# Altium PCB VL812 USB3.0 .PcbDoc (part 2 of 2)
Units mil, origin at the board's own origin, x right, y up, seen from the top; angles counter-clockwise.
Board outline 3076.06 x 1594.49 mil, 2 copper layers (TOP, BOTTOM), stack 60.4 mil thick; 108 components, 81 nets, 357 pads, 473 vias.
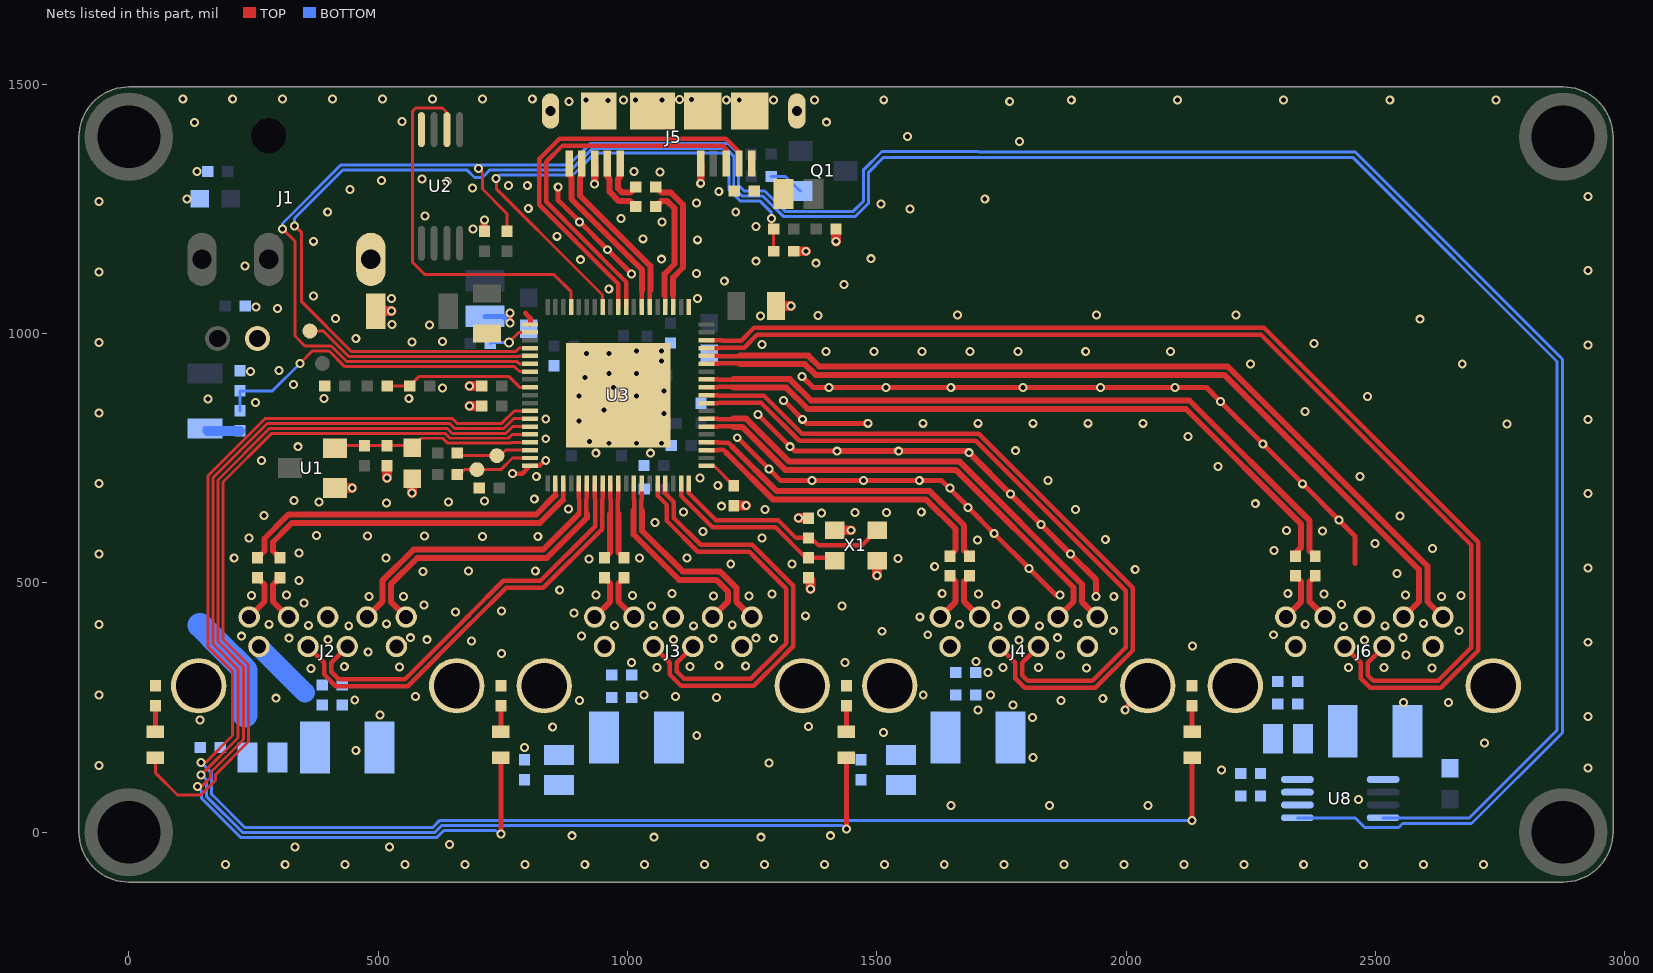
[diagram p2: the nets of this part, all layers, seen from the top]

## Via types
v1: diameter 18/18 (per signal layer), hole 9.84, TOP to BOTTOM, 423 vias
v2: diameter 18/18 (per signal layer), hole 10, TOP to BOTTOM, 42 vias
v3: diameter 20/20 (per signal layer), hole 12, TOP to BOTTOM, 8 vias

## Nets (pads, with @x,y where several pads share a name; then routed paths per layer and width w, separated by ;. In a path a pad name is that pad's centre, name@x,y a point inside that pad or via, vN(x,y) a via of type N, cw(c..) or ccw(c..) an arc to the next point about the centre after c; other vN are vias at no path point) (continued)
DGND: C1.1 C2.1 C3.1 C4.1 C5.1 C6.1 C7.1 C8.1 C9.1 C10.1 C11.1 C12.1 C13.1 C14.1 C15.1 C16.1 C17.1 C18.1 C21.1 C22.1 C23.1 C24.1 C25.1 C26.1 C27.1 C28.1 C29.1 C30.1 C33.1 C34.1 C35.1 C36.1 C39.1 C40.1 C41.1 C42.1 C45.1 C46.1 C47.1 C48.1 C49.1 C50.1 C55.1 C56.1 C57.1 C58.1 C59.1 C60.1 CE1.2 D1.A J1.3 J2.4 J2.7 J2.G1 J2.G2 J3.4 J3.7 J3.G1 J3.G2 J4.4 J4.7 J4.G1 J4.G2 J5.5 J5.8 J5.G1 J5.G2 J5.G3 J5.G4 J5.G5 J5.G6 J6.4 J6.7 J6.G1 J6.G2 R4.2 R7.2 R11.2 R12.2 R13.2 R14.2 R15.2 R17.1 U1.1 U2.4 U3.20 U3.57 U3.G1 U8.1 X1.2 X1.4 | length 4386.7
  TOP w6: v1(1325.95,773) v1@1325.95,774
  TOP w9: v1(768.95,719) 788.53,719 U3.57@804.17,734.65 823.6,734.65 834.95,746 v1(835.95,745)
  TOP w10: v1@505.95,1306 v1(506.95,1307) ; v1(860.95,1294) 860.95,1267 v1(903.95,1224) v1(959.95,1168) 1007.95,1120 v1(1007.95,1119) ; v1(1219.95,791) 1220.95,791 v1(1283.95,728) 1306.95,705 v1(1369.95,705) v1(1472.95,705) v1(1584.95,705) 1629.95,705 1682.95,652 v1(1682.95,651) v1(1735.25,598.7) v1(1805.25,528.7) 1857.95,476 v1(1866.95,476) ; v1@1261.95,837 v1(1325.95,773) 1334.95,764 v1(1419.95,764) ; v1(1312.95,866) v1(1350.92,828.04) 1358.95,820 v1@1480.95,820 ; v1(1349.95,914) 1372.25,891.7 v1(1403.74,891.7) v1(1518.15,891.7) v1(1648.15,891.7) v1(1793.15,891.7) v1(1948.15,891.7) v1(2098.15,891.7) 2160.74,891.7 v1(2188.74,863.7) v1(2273.74,778.7) v1(2353.74,698.7) v1(2426.24,626.2) 2458.74,593.7 2458.74,538.7 ; v1@1477.95,823 v1@1478.45,823.5 ; v1@1477.95,824 v1@1478.45,823.5 ; v1@1478.95,823 v1@1478.45,823.5 ; v1@1478.95,824 v1@1478.45,823.5 ; v1(1738.95,457) v1@1742.95,453 ; v1(1997.95,245) 1997.95,248.5 J4.G2@2043.15,293.7 J4.G2@2043.15,308.2 ; J6.G2@2736.06,293.7 J6.G2@2736.06,308.2
  TOP w12: v1(1419.95,764) v1(1543.74,764) 1681.95,764 v1(1684.95,761) v1(1767.95,678) v1(1828.95,617) v1(1887.95,558) 1938.95,507 v1(1938.95,473)
  TOP w15: C6.1@712.95,1205 v1(712.95,1228) ; v1(934.09,1300) J5.8@934.09,1340.94 ; v1(1146.69,1301.26) J5.5@1146.69,1340.94
  TOP w20: U1.1@412.95,690 v1(447.95,690) ; D1.A@495.12,1045 v1(526.95,1045) ; v1(517.95,710) R4.2@517.95,735 ; v1(567.95,680) C4.1@567.95,709 ; v1(682.95,855) C9.1@707.95,855 ; v1(682.95,895) C17.1@707.95,895 ; R11.2@1212.95,655 v1(1237.95,655) ; C27.1@1297.95,1055 v1(1327.95,1055) ; R7.2@1332.95,1165 v1(1357.95,1165) ; v1(1342.95,630) C30.1@1362.95,630 ; C29.1@1362.95,510 1366.95,506 v1(1366.95,488) ; X1.4@1415.63,605.51 v1(1447.95,605.51) ; v1(1417.95,1185) C56.1@1417.95,1210 ; v1(1500.28,515) X1.2@1500.28,544.49
  BOTTOM w10: v1(902.95,875) 924.95,875 v1(952.95,847) ; v1(917.95,960) 914.95,957 v1(914.95,912) 922.95,920 v1(962.95,920) ; v1(962.95,960) v1(962.95,920) ; v1(971.95,892) 971.95,911 v1(962.95,920) ; v1(1017.95,875) 1027.95,885 v1(1072.95,885) ; C26.1@1038.95,916 1034.95,920 v1(1017.95,920) v1(962.95,920)
  other v1: 193.4,-65 313.53,-65 433.67,-65 553.81,-65 673.95,-65 794.09,-65 914.23,-65 1034.36,-65 1154.5,-65 1274.64,-65 1394.78,-65 1514.92,-65 1635.05,-65 1755.19,-65 1875.33,-65 1995.47,-65 2115.61,-65 2235.74,-65 2355.88,-65 2476.02,-65 2596.16,-65 2716.3,-65 332.95,-30 522.95,-30 642.95,-25 1052.95,-10 1267.95,-10 888.95,-7 1406.95,-7 1648.74,53.7 1846.24,53.7 2043.74,53.7 2465.64,66 2191.3,125 2926.3,128.6 -59.85,133.6 1283.74,138.7 1812.95,150 455,163.7 792.95,170 2718.74,178.7 1138.74,193.7 1512.95,200 849.95,211 1362.95,212 142.95,225 1811.95,230 2926.3,231.91 503.95,235 1702.95,245 1772.95,255 2556.3,260 2646.3,260 903.95,264 1868.95,264 452.95,265 295,268.7 1952.95,268 1177.95,270 574.95,272 1095.95,272 -59.85,274.95 1032.95,275 1592.95,275 1727.95,275 1722.95,320 364.95,328 1919.95,329 2612.87,329 1058.95,330 1752.95,330 1823.95,330 2445.87,330 2516.87,330 542.95,331 431.95,332 1124.95,332 1236.95,333 1182.95,334 1007.95,340 1435.95,340 1698.95,342 1867.95,355 2560.87,355 747.32,358.7 479.95,361 2133.15,373.7 2926.3,380.92 687.32,383.7 1784.95,385 2477.87,385 398.95,386 597.95,386 1091.95,386 1170.95,388 1292.95,388 320.95,389 1257.95,389 564.95,390 1861.95,390 2554.87,390 225.95,393 907.32,393.7 1601.95,396 2294.87,396 1509.95,403 1973.95,404 2666.87,404 1742.95,413 2435.87,413 440.95,414 1131.95,414 1825.95,414 2518.87,414 359.95,415 973.95,415 1051.95,415 -59.85,416.3 1209.95,416 280.95,417 1665.95,417 2358.87,417 516.95,418 1902.95,419 2595.87,419 1585.95,432 1356.95,434 892.95,440 654.95,442 747.32,443.7 1047.95,454 1429.95,454 591.95,456 2431.87,457 350.95,460 481.95,473 550.95,473 1243.74,473.7 1974.95,473 2631.87,473 1171.95,474 245.95,475 1009.95,475 2671.3,475 315.95,476 936.95,476 2559.87,476 1088.74,478.7 1289.95,478 1703.95,478 2396.87,478 1630.95,479 2323.87,479 863.95,486 341.3,505 2543.15,518.7 589.95,523 680.95,524 814.95,524 2017.95,527 2926.3,529.94 1615.95,533 1206.95,538 1329.95,538 922.95,548 1541.95,549 211.3,550 515.95,550 1023.95,550 1118.95,550 -59.85,557.65 341.3,560 2296.3,565 2613.74,568.7 2498.74,578.7 1701.95,586 1957.95,587 241.3,590 1269.95,590 478.74,593.7 708.95,593 819.95,593 592.95,594 376.3,595 1151.16,603.21 2393.74,603.7 2321.3,605 1054.95,621 2548.74,633.7 271.3,635 1388.95,640 1455.95,641 1518.95,641 1111.95,642 1588.95,642 1275.95,647 1897.95,647 881.95,648 1188.74,653.7 2258.74,658.7 516.3,660 380.95,662 640.95,662 712.95,664 331.3,665 812.95,668 2926.3,678.95 1646.3,690 1180.95,695 -59.85,699 1842.95,705 1144.95,710 816.95,713 2468.74,713.7 2183.74,733.7 266.3,745 936.3,760 1045.95,760 1777.95,765 338.95,773 962.95,780 1017.95,780 1067.95,780 923.74,783.7 835.95,789 2123.74,793.7 2763.74,818.7 1481.95,820 1592.31,820 1702.67,820 1813.02,820 1923.38,820 2033.74,820 902.95,825 2926.3,827.96 835.95,829 1261.95,838 -59.85,840.35 1072.95,840 2358.74,843.7 253.95,862 158.74,868.7 391.3,870 561.3,870 2483.74,873.7 628.95,891 329.95,898 243.95,924 300.95,926 2248.74,938.7 2673.74,938.7 1067.95,945 1918.74,963.7 2088.74,963.7 1397.95,964 1494.25,964 1590.55,964 1686.85,964 1783.15,964 1017.95,965 1067.95,965 2926.3,976.97 1269.95,978 2376.3,980 -59.85,981.7 567.95,983 628.74,983.7 455,990 602.95,1017 527.95,1018 2588.74,1028.7 414.09,1030 1266.95,1035 1381.95,1036 1661.3,1037 1940.65,1037 2220,1037 297.95,1050 254.95,1053 526.95,1070 1139.95,1070 370,1075 962.35,1089 1433.74,1098.7 1193.95,1105 1137.95,1120 -59.85,1123.05 2926.3,1125.99 232.95,1135 1377.95,1141 1257.95,1145 905.31,1148 1067.95,1149 1487.95,1150 370,1185 1139.95,1188 1031.3,1190 858.15,1195 689.95,1210 1257.95,1215 1068.95,1224 986.95,1231 593.95,1236 398.74,1243.7 1216.95,1244 1566.3,1250 800.95,1251 1507.95,1260 1137.95,1262 -59.85,1264.4 116.3,1270 1716.3,1270 2926.3,1275 1182.95,1285 443.74,1288.7 688.95,1292 760.95,1297 798.95,1297 637.95,1305 587.95,1310 1064.95,1324 136.3,1325 1012.95,1325 1786.3,1385 1561.3,1395 131.95,1423 1398.74,1423.7 547.95,1425 882.95,1465 1766.3,1465 960.95,1467 916.95,1468 991.95,1468 1015.95,1468 1068.95,1468 1197.95,1468 1223.95,1468 1292.95,1468 1374.95,1468 1513.74,1468.7 1889.73,1468 2102.62,1468 2315.52,1468 2528.41,1468 2741.3,1468 1103.95,1469 1127.95,1469 108.15,1470 208.26,1470 308.38,1470 408.49,1470 508.61,1470 608.72,1470 708.84,1470 808.95,1470
EXTPWRON: R6.2 R8.2 U3.47 | length 302.7
  TOP w6: R6.2@517.95,895 R8.2@562.95,895 581.45,913.5 762.56,913.5 783.93,892.13 U3.47@804.17,892.13
GRN1: U3.53 U4.1 | length 1491.2
  TOP w6: U4.1@53.15,149.41 53.15,119.29 97.71,74.73 144.03,74.73 173.74,104.45 173.74,115.5 239.95,181.71 239.95,335.14 188.74,386.36 188.74,702.36 286.38,800 633.81,800 643.81,790 760.95,790 768.59,797.64 U3.53@804.17,797.64
GRN2: U3.52 U5.1 | length 2176.8
  TOP w6: v2(137.19,91.23) 145.19,91.23 163.74,109.79 163.74,119.64 229.95,185.86 229.95,331 178.74,382.21 178.74,706.5 282.24,810 637.95,810 647.95,800 756.24,800 769.62,813.39 U3.52@804.17,813.39
  TOP w10: v2(746.06,-4) U5.1@746.06,149.41
  BOTTOM w6: v2(137.19,91.23) 145.45,82.97 145.45,68.25 166.26,47.44 224.7,-11 616.95,-11 631.45,3.5 735.45,3.5 v2@742.95,-4
GRN3: U3.51 U6.1 | length 2852.4
  TOP w6: v2(144.95,115) 218.95,189 218.95,327 168.74,377.21 168.74,710.64 278.1,820 642.95,820 652.95,810 752.1,810 771.23,829.13 U3.51@804.17,829.13
  TOP w10: v2(1438.97,6) U6.1@1438.97,149.41
  BOTTOM w6: v2(144.95,115) 155.45,105 155.45,72.4 228.85,-1 612.81,-1 627.31,13.5 1430.45,13.5 v2@1437.95,6
GRN4: U3.50 U7.1 | length 3532.1
  TOP w6: v2(144.95,140) 153.95,140 207.95,194 207.95,322.86 158.74,372.07 158.74,714.79 273.95,830 647.95,830 657.95,820 747.95,820 772.83,844.88 U3.50@804.17,844.88
  TOP w10: v2(2131.89,23.7) U7.1@2131.89,149.41
  BOTTOM w6: v2(144.95,140) 165.45,119.5 165.45,76.54 174.54,67.45 232.99,9 608.67,9 623.67,24 1881.95,24 ; 1882.25,23.7 v2(2131.89,23.7)
N17202796: L1.1 U3.39 | length 118.8
  TOP w10: v2(763.95,1021) v2(763.95,1040.85) ; 794.95,1040.85 804.95,1030.85 804.95,1018.89 U3.39@804.17,1018.11
  BOTTOM w10: L1.1@713.95,1034.57 L1.1@750.39,1034.57 ; v2(763.95,1021) L1.1@750.39,1034.57 ; v2(763.95,1040.85) 757.67,1034.57 L1.1@750.39,1034.57
N19199549: R12.1 U4.2 | length 51.9
  TOP w10: U4.2@53.15,201.77 R12.1@53.15,253.7
N19199561: R13.1 U5.2 | length 51.9
  TOP w10: U5.2@746.06,201.77 R13.1@746.06,253.7
N19199573: R14.1 U6.2 | length 51.9
  TOP w10: U6.2@1438.97,201.77 R14.1@1438.97,253.7
N19199609: R15.1 U7.2 | length 51.9
  TOP w10: U7.2@2131.89,201.77 R15.1@2131.89,253.7
N19280601: Q1.G R3.1 | length 71
  BOTTOM w6: R3.1@1287.95,1315 1316.95,1315 1345.95,1286 Q1.G@1346.95,1286
N19324774: C55.2 FB4.1 J5.1 | length 7.1
  TOP w15: FB4.1@1307.95,1285 FB4.1@1312.95,1280
N19347185: R19.1 U3.40 | length 88.5
  TOP w6: v3(761.95,982) 782.31,1002.36 U3.40@804.17,1002.36
  BOTTOM w6: R19.1@724.95,980 726.95,982 v3(761.95,982)
OVCUR1: R16.2 R17.2 U3.45 | length 671.5
  TOP w6: v2(342.95,940) 367.95,965 401.67,965 433.17,933.5 773.45,933.5 783.33,923.62 U3.45@804.17,923.62
  BOTTOM w6: R16.2@222.95,845 R17.2@222.95,885 287.95,885 v2(342.95,940)
OVCUR2B: R18.2 U3.44 U8.5 | length 5255.9
  TOP w6: v2(307.95,1210) 332.95,1185 332.95,995 352.95,975 405.81,975 437.31,943.5 778.82,943.5 782.95,939.37 U3.44@804.17,939.37 ; v2(701.45,1330.76) 708.95,1323.26 708.95,1289.85 757.95,1240.86 757.95,1240 R18.2@757.95,1205
  BOTTOM w6: v2(307.95,1210) 307.95,1220.86 425.35,1338.26 v2@698.19,1338.26 ; U8.5@2343.15,29.02 2458.56,29.02 2478.17,9.4 2546.17,9.4 2554.17,17.4 2692.44,17.4 2874.74,199.7 2874.74,948.26 2458.61,1364.39 1703.57,1364.39 1702.95,1365 1510.04,1365 1473.45,1328.41 1473.45,1265.65 1452.8,1245 1316.1,1245 1275.1,1286 1233.95,1286 1222.95,1297 1222.95,1360 1201.45,1381.5 926.03,1381.5 882.79,1338.25 874.51,1338.25 v2@704.71,1338.26 ; v2@698.19,1338.26 v2@701.45,1335 ; v2@698.19,1338.26 v2(701.45,1330.76) ; v2(701.45,1330.76) v2@704.71,1338.26 ; v2(701.45,1330.76) v2@701.45,1335 ; v2@701.45,1335 v2@704.71,1338.26
P5V_DP1: C36.2 C42.2 C50.2 F1.1 FB1.2 FB2.2 FB3.2 R16.1 R20.1 R20.2 | length 301.2
  BOTTOM w10: F1.1@152.95,810 F1.1@157.95,805
  BOTTOM w20: F1.1@157.95,805 R16.1@222.95,805
  BOTTOM w35: R20.1@225.87,330.08 R20.1@233.31,324.64
  BOTTOM w47.17: R20.2@182.03,373.92 R20.2@183.03,374.92 ; R20.1@225.87,330.08 R20.1@226.87,331.08
  BOTTOM w50: 142.95,415 183.03,374.92 226.87,331.08 233.31,324.64 233.31,235.36
P5V_DP1_E: C33.2 C34.2 C35.2 FB1.1 J2.1 | length 130.6
  BOTTOM w40: J2.1@260.87,372.44 260.87,372.09 352.95,280
P5V_DP2_E: C39.2 C40.2 C41.2 FB2.1 J3.1
P5V_DP3_E: C47.2 C48.2 C49.2 FB3.1 J4.1
P5V_DP4: C46.2 C60.2 FB5.2 U8.6 U8.7 U8.8
P5V_DP4_E: C57.2 C58.2 C59.2 FB5.1 J6.1
PWREN1: DESIGNATOR1/2.1 U3.43 | length 463.2
  TOP w6: DESIGNATOR1/2.1@362.95,1005 389.95,1005 441.45,953.5 781.24,953.5 782.86,955.12 U3.43@804.17,955.12
PWREN2B: U3.42 U8.4 | length 4786.8
  TOP w6: v2(332.21,1216.06) 346.45,1201.82 346.45,1063.5 446.45,963.5 775.45,963.5 782.82,970.87 U3.42@804.17,970.87
  BOTTOM w6: v2(332.21,1216.06) 332.21,1230.97 429.5,1328.26 677.69,1328.26 692.95,1313 708.95,1313 724.21,1328.25 729.2,1328.26 743.71,1328.25 878.65,1328.25 886.93,1328.25 930.18,1371.5 1197.1,1371.5 1212.95,1355.64 1212.95,1292.86 1229.81,1276 1270.95,1276 1311.95,1235 1456.94,1235 1483.45,1261.51 1483.45,1323.41 1513.42,1353.39 2454.05,1353.39 2863.74,943.7 2863.74,204.26 2688.5,29.02 U8.4@2515.19,29.02
RST_OUT: C4.2 R2.2 R4.1 U1.2 U3.54 | length 414.1
  TOP w6: U1.2@412.95,770 417.95,775 R2.2@472.95,775 R4.1@517.95,775 C4.2@562.95,775 ; U3.54@804.17,781.89 766.99,781.89 765.1,780 639.67,780 629.67,790 586.95,790 C4.2@567.95,771 ; C4.2@562.95,775 566.95,771 C4.2@567.95,771 ; C4.2@562.95,775 C4.2@567.95,771
SMCLK/TX: DESIGNATOR1/3.1 R10.2 U3.55 | length 151.9
  TOP w6: R10.2@658.95,760 663.95,755 DESIGNATOR1/3.1@737.95,755 743.95,755 755.09,766.14 U3.55@804.17,766.14
SMDAT/RX: DESIGNATOR1.1 R9.2 U3.56 | length 159.1
  TOP w6: R9.2@658.95,717 662.6,717 672.6,727 DESIGNATOR1.1@697.95,727 745.95,727 769.35,750.39 U3.56@804.17,750.39
SPISO: U2.2 U3.35 | length 785.2
  TOP w6: U2.2@637.78,1409 637.78,1443.17 628.95,1452 574.95,1452 568.4,1445.44 568.4,1143.41 593.81,1118 852.38,1118 886.85,1083.53 U3.35@886.85,1053.54
SSREXT: R11.1 U3.1 | length 70.9
  TOP w6: U3.1@1158.5,734.65 1173.31,734.65 R11.1@1212.95,695
SSRX0+: J5.10 U3.26 | length 347.7
  TOP w9: U3.26@1028.58,1053.54 1028.58,1086
  TOP w12: J5.10@882.91,1340.94 882.91,1317.68 887.21,1313.38 887.21,1269.75 1028.59,1128.37 1028.58,1086
SSRX0-: J5.9 U3.25 | length 348.3
  TOP w9: U3.25@1044.33,1053.54 1044.33,1086.37 1045.59,1087.63
  TOP w12: J5.9@908.5,1340.94 908.5,1317.32 904.21,1313.02 904.21,1276.79 1045.59,1135.41 1045.59,1087.63
SSRX1+: J2.6 U3.62 | length 602.8
  TOP w9: 901.97,640.35 903.47,641.85 ; U3.62@902.6,699.21 902.6,668.22 903.47,667.35 903.47,641.85 ; 903.47,641.85 901.97,638.02 901.97,638.1 903.47,641.85
  TOP w12: J2.6@477.4,431.5 508.27,462.37 508.27,504.36 570.91,567 830.95,567 901.97,638.02
SSRX1-: J2.5 U3.63 | length 600.9
  TOP w9: U3.63@918.35,699.21 918.35,668.22 917.47,667.35 917.47,641.85 ; 917.47,641.85 918.97,640.35 918.97,638.1 917.47,641.85
  TOP w12: J2.5@556.14,431.5 525.27,462.37 525.27,497.32 577.95,550 837.99,550 918.97,630.98 918.97,638.1
SSRX2+: J3.6 U3.69 | length 422.5
  TOP w9: 1012.21,640.35 1013.71,641.85 ; U3.69@1012.83,699.21 1012.83,668.22 1013.71,667.35 1013.71,649.22 ; 1012.21,645.47 1012.21,647.72 1013.71,649.22 ; 1012.21,645.47 1013.71,649.22 ; 1012.21,645.47 1013.71,645.47 ; 1012.21,645.47 1013.71,641.85 ; 1013.71,641.85 1013.71,645.47 ; 1013.71,645.47 1013.71,649.22
  TOP w12: 1012.21,645.47 1012.21,640.35 1012.21,597.05 1103.26,506 1178.06,506 1201.19,482.88 1201.19,462.37 1185.57,446.75 J3.6@1170.31,431.5
SSRX2-: J3.5 U3.70 | length 422.5
  TOP w9: U3.70@1028.58,699.21 1028.58,668.22 1027.71,667.35 1027.71,649.22 ; 1029.21,640.35 1027.71,641.85 ; 1027.71,641.85 1027.71,645.47 ; 1027.71,641.85 1029.21,645.47 ; 1027.71,645.47 1027.71,649.22 ; 1027.71,645.47 1029.21,645.47 ; 1027.71,649.22 1029.21,645.47 ; 1027.71,649.22 1029.21,647.72 1029.21,645.47
  TOP w12: 1029.21,645.47 1029.21,640.35 1029.21,604.09 1110.3,523 1185.11,523 1218.19,489.92 1218.19,462.35 1225.05,455.5 J3.5@1249.05,431.5
SSRX3+: J4.6 U3.6 | length 946
  TOP w9: U3.6@1158.5,813.39 1182.12,813.39 1182.99,814.26 1208.49,814.26 ; 1208.49,814.26 1212.24,812.76 1209.99,812.76 1208.49,814.26
  TOP w12: 1212.24,812.76 1230.15,812.76 1316.91,726 1658.85,726 1894.1,490.75 1894.1,462.37 J4.6@1863.23,431.5
SSRX3-: J4.5 U3.7 | length 974.2
  TOP w9: U3.7@1158.5,829.13 1182.12,829.13 1182.99,828.26 1208.49,828.26 ; 1208.49,828.26 1212.24,829.76 1209.99,829.76 1208.49,828.26
  TOP w12: 1212.24,829.76 1237.19,829.76 1323.95,743 1665.89,743 1911.1,497.79 1911.1,462.37 J4.5@1941.97,431.5
SSRX4+: J6.6 U3.14 | length 1712
  TOP w9: U3.14@1158.5,939.37 1182.12,939.37 1182.99,940.24 1221.68,940.24 ; 1221.68,940.24 1223.18,938.74 1225.43,938.74 1221.68,940.24
  TOP w12: 1225.43,938.74 1355.56,938.74 1377.3,917 2196.4,917 2587.01,526.39 2587.01,462.37 J6.6@2556.14,431.5
SSRX4-: J6.5 U3.15 | length 1740.2
  TOP w9: U3.15@1158.5,955.12 1182.12,955.12 1182.99,954.24 1221.68,954.24 ; 1221.68,954.24 1223.18,955.74 1225.43,955.74 1221.68,954.24
  TOP w12: 1225.43,955.74 1362.6,955.74 1384.34,934 2203.44,934 2604.01,533.43 2604.01,462.37 J6.5@2634.88,431.5
SSTX0+: C51.1 U3.23 | length 257.9
  TOP w9: U3.23@1075.83,1053.54 1075.83,1074.78 ; 1075.83,1074.78 1074.33,1076.28 1074.33,1077.4 1075.83,1074.78
  TOP w12: C51.1@1056.45,1254.33 1067.64,1265.51 1079.97,1265.51 1094.26,1251.22 1094.26,1139.35 1074.33,1119.42 1074.33,1077.4
SSTX0+_E: C51.2 J5.7 | length 123.5
  TOP w12: J5.7@959.68,1340.94 959.68,1314.3 963.98,1310 963.98,1283.97 982.44,1265.51 1005.27,1265.51 C51.2@1016.45,1254.33
SSTX0-: C52.1 U3.22 | length 282.4
  TOP w9: U3.22@1091.57,1053.54 1091.57,1077.16
  TOP w12: C52.1@1056.45,1293.7 1067.95,1282.51 1087.01,1282.51 1111.26,1258.26 1111.26,1132.31 1091.33,1112.37 1091.57,1077.16
SSTX0-_E: C52.2 J5.6 | length 95.3
  TOP w12: J5.6@985.27,1340.94 985.27,1314.29 980.98,1310 980.98,1291.02 989.48,1282.51 1005.27,1282.51 C52.2@1016.45,1293.7
SSTX1+: C31.1 U3.59 | length 687.8
  TOP w9: 855.35,675.44 U3.59@855.35,699.21
  TOP w12: C31.1@257.95,550 271.95,564 271.95,589 313.95,631 319.95,637 816.91,637 855.35,675.44
SSTX1+_E: C31.2 J2.9 | length 97
  TOP w12: J2.9@241.18,431.5 271.95,462.27 271.95,496 C31.2@257.95,510
SSTX1-: C32.1 U3.60 | length 689.4
  TOP w9: 870.23,666.28 871.1,668.22 ; 870.23,667.35 871.1,668.22 ; U3.60@871.1,699.21 871.1,668.22
  TOP w9.85: 870.23,666.28 870.23,667.35
  TOP w12: C32.1@302.95,550 288.95,564 288.95,581.96 320.99,614 326.99,620 823.95,620 870.23,666.28
SSTX1-_E: C32.2 J2.8 | length 97.1
  TOP w12: C32.2@302.95,510 288.95,496 288.95,462.47 J2.8@319.92,431.5
SSTX2+: C37.1 U3.66 | length 158.9
  TOP w9: U3.66@965.59,699.21 965.59,668.22 966.46,667.35 966.46,641.85 ; 966.46,641.85 964.96,640.35 964.96,638.1 966.46,641.85
  TOP w12: C37.1@953.78,549.92 964.96,561.11 964.96,638.1
SSTX2+_E: C37.2 J3.9 | length 95.8
  TOP w12: J3.9@934.09,431.5 964.96,462.36 964.96,498.74 C37.2@953.78,509.92
SSTX2-: C38.1 U3.67 | length 158.9
  TOP w9: U3.67@981.34,699.21 981.34,668.22 980.46,667.35 980.46,641.85 ; 980.46,641.85 981.96,638.1 981.96,640.35 980.46,641.85
  TOP w12: 981.96,638.1 981.96,561.1 C38.1@993.15,549.92
SSTX2-_E: C38.2 J3.8 | length 95.8
  TOP w12: C38.2@993.15,509.92 981.96,498.74 981.96,462.37 J3.8@1012.83,431.5
SSTX3+: C43.1 U3.3 | length 624.4
  TOP w9: U3.3@1158.5,766.14 1182.12,766.14 1182.99,767.02 1191.94,767.02 1198.45,760.5
  TOP w12: 1198.45,760.5 1291.95,667 1598.91,667 1657.87,608.04 1657.87,565.92 1646.69,554.74 C43.1@1646.69,553.86
SSTX3+_E: C43.2 J4.9 | length 99.8
  TOP w12: J4.9@1627.01,431.5 1657.87,462.36 1657.87,502.67 C43.2@1646.69,513.86
SSTX3-: C44.1 U3.4 | length 651.3
  TOP w9: U3.4@1158.5,781.89 1182.12,781.89 1182.99,781.02 1201.98,781.02 1210.47,772.52
  TOP w12: 1210.47,772.52 1298.99,684 1605.95,684 1674.87,615.08 1674.87,565.08 C44.1@1686.06,553.86
SSTX3-_E: C44.2 J4.8 | length 99.8
  TOP w12: C44.2@1686.06,513.86 1674.87,502.67 1674.87,462.37 J4.8@1705.75,431.5
SSTX4+: C53.1 U3.11 | length 1380
  TOP w9: U3.11@1158.5,892.13 1182.12,892.13 1182.99,893 1208.49,893 ; 1208.49,893 1209.99,891.5 1212.24,891.5 1208.49,893
  TOP w12: 1212.24,891.5 1318.41,891.5 1361.21,848.7 2119.7,848.7 2350.79,617.61 2350.79,571.25 2339.6,560.07 C53.1@2339.6,553.86 C53.1@2339.6,552.98
SSTX4+_E: C53.2 J6.9 | length 99.8
  TOP w12: J6.9@2319.92,431.5 2350.79,462.36 2350.79,502.67 C53.2@2339.6,513.86
SSTX4-: C54.1 U3.12 | length 1407.6
  TOP w9: U3.12@1158.5,907.87 1182.12,907.87 1182.99,907 1208.49,907 ; 1208.49,907 1209.99,908.5 1212.24,908.5 1208.49,907
  TOP w12: 1212.24,908.5 1325.45,908.5 1368.25,865.7 2126.74,865.7 2367.79,624.65 2367.79,564.2 C54.1@2378.53,553.42
SSTX4-_E: C54.2 J6.8 | length 99.8
  TOP w12: C54.2@2378.97,513.86 2367.79,502.67 2367.79,462.37 J6.8@2398.66,431.5
SSXI: C29.2 U3.75 X1.1 | length 386.8
  TOP w9: U3.75@1107.32,699.21 1107.32,674.63 1169.95,612 1295.95,612 1357.95,550 C29.2@1362.95,550 1410.12,550 X1.1@1415.63,544.49
SSXO: C30.2 U3.76 X1.3 | length 452.6
  TOP w9: U3.76@1123.07,699.21 1123.07,679.88 1176.95,626 1301.75,626 1303.75,624 1337.95,590 C30.2@1362.95,590 1367.95,590 1382.95,575 1469.76,575 X1.3@1500.28,605.51
USBDP+: J5.3 U3.28 | length 763.2
  TOP w9: U3.28@997.09,1053.54 997.09,1103.31 984.95,1115.45 836.95,1264 836.95,1344.2 869.69,1376.94 1190.93,1376.94 1197.87,1370 J5.3@1197.87,1340.94
USBDP-: J5.2 U3.29 | length 813.9
  TOP w9: U3.29@981.34,1053.54 981.34,1099.26 970.95,1109.65 822.95,1258.2 822.95,1350 863.89,1390.94 1197.01,1390.94 1223.46,1364.49 J5.2@1223.46,1340.94
USBHP1+: J2.3 U3.64 | length 812.3
  TOP w9: J2.3@438.03,372.44 405.66,340.07 405.66,322.09 420.75,307 553.58,307 676.33,429.75 682.12,435.43 750.67,504 825.38,504 934.97,613.59 934.97,667.35 934.09,668.22 U3.64@934.09,699.21
USBHP1-: J2.2 U3.65 | length 858.7
  TOP w9: J2.2@359.29,372.44 391.66,340.07 391.66,316.29 414.95,293 559.38,293 682.24,415.75 692.02,425.53 756.47,490 831.18,490 940.57,599.39 948.97,607.79 948.97,667.35 949.84,668.22 U3.65@949.84,699.21
USBHP2+: J3.3 U3.72 | length 806.4
  TOP w9: U3.72@1060.08,699.21 1060.95,698.34 1060.95,674.2 1078.95,656.2 1078.95,624.2 1140.8,562.35 1244.07,562.35 1295.95,510.46 1302.95,503.46 1317.95,488.46 1317.95,378.46 1307.44,367.95 1300.65,361.16 1247.19,307.7 1113.12,307.7 1098.57,322.24 1098.57,340.07 J3.3@1130.94,372.44
USBHP2-: J3.2 U3.73 | length 852.8
  TOP w9: J3.2@1052.2,372.44 1084.57,340.07 1084.57,316.45 1107.32,293.7 1252.99,293.7 1310.55,351.26 1317.34,358.05 1331.95,372.66 1331.95,494.26 1316.95,509.26 1309.95,516.26 1249.87,576.35 1146.6,576.35 1092.95,630 1092.95,662 1074.95,680 1074.95,698.34 U3.73@1075.83,699.21
USBHP3+: J4.3 U3.9 | length 1421.7
  TOP w9: U3.9@1158.5,860.63 1182.12,860.63 1182.99,861.5 1267.65,861.5 1344.15,785 1698.15,785 1998.83,484.32 1998.83,370.36 1932.23,303.76 1802.09,303.76 1791.49,314.37 1791.49,340.07 J4.3@1823.86,372.44
USBHP3-: J4.2 U3.10 | length 1491.3
  TOP w9: U3.10@1158.5,876.38 1182.12,876.38 1182.99,875.5 1273.45,875.5 1349.95,799 1703.95,799 2012.83,490.12 2012.83,364.57 1938.03,289.76 1796.3,289.76 1777.49,308.57 1777.49,340.07 J4.2@1745.12,372.44
USBHP4+: J6.3 U3.16 | length 2235.7
  TOP w9: U3.16@1158.5,970.87 1182.12,970.87 1182.99,971.74 1233.83,971.74 1260.09,998 2269.64,998 2691.74,575.9 2691.74,370.36 2625.14,303.76 2495.01,303.76 2484.4,314.37 2484.4,340.07 J6.3@2516.77,372.44
USBHP4-: J6.2 U3.17 | length 2305.2
  TOP w9: U3.17@1158.5,986.61 1189,986.61 1189.87,985.74 1228.03,985.74 1254.3,1012 2275.44,1012 2705.74,581.7 2705.74,364.57 2630.94,289.76 2489.21,289.76 2470.4,308.57 2470.4,340.07 J6.2@2438.03,372.44
VBUSDET: R5.2 R7.1 U3.31 | length 1084.9
  TOP w6: U3.31@949.84,1053.54 949.84,1077.11 871.52,1155.57 834.59,1192.5 807.81,1219.28 736.95,1290.14 v2@736.95,1310 ; v2(1288.95,1231) 1288.95,1214 R5.2@1292.95,1210 R7.1@1292.95,1165 ; v2@736.95,1310 736.45,1310.5 v2(736.45,1310.76) v2@736.95,1310
  BOTTOM w6: v2(736.45,1310.76) 743.69,1318 890.82,1318 934.32,1361.5 1192.95,1361.5 1202.95,1351.5 1202.95,1288.71 1225.67,1266 1264.95,1266 1288.95,1242 v2(1288.95,1231)
pads on no net: J1._ J5.4 U3.21
copper on no net: | length 2960
  BOTTOM w6: 675.95,1021.5 772.95,1021.5 772.95,1018.5 675.95,1018.5 675.95,1024.5 772.95,1024.5 772.95,1030.5 ; 675.95,1027.5 675.95,1033.5 ; 675.95,1030.5 675.95,1036.5 ; 681.09,1058 681.09,1010 687.09,1010 687.09,1058 693.09,1058 693.09,1010 699.09,1010 699.09,1058 705.09,1058 705.09,1010 711.09,1010 711.09,1058 717.09,1058 717.09,1010 723.09,1010 723.09,1058 729.09,1058 729.09,1010 735.09,1010 735.09,1058 741.09,1058 741.09,1010 738.09,1010 738.09,1058 732.09,1058 732.09,1010 726.09,1010 726.09,1058 720.09,1058 720.09,1010 714.09,1010 714.09,1058 708.09,1058 708.09,1010 702.09,1010 702.09,1058 696.09,1058 696.09,1010 690.09,1010 690.09,1058 684.09,1058 684.09,1010 678.09,1010 678.09,1058 675.95,1054.5 762.24,1054.5 762.09,1010 ; 744.09,1010 744.09,1058 ; 753.09,1010 756.09,1010 ; 753.09,1058 747.09,1058 747.09,1010 750.09,1010 750.09,1058 756.09,1058 ; 759.09,1010 765.09,1010 765.24,1051.5 675.95,1051.5 675.95,1057.5 759.09,1057.64 ; 772.95,1033.5 772.95,1039.5 675.95,1039.5 675.95,1045.5 771.09,1045.64 771.45,1015.5 675.95,1015.5 675.95,1012.5 768.09,1012.14 768.24,1048.5 675.95,1048.5 675.95,1042.5 772.95,1042.5 772.95,1036.5 ; 675.95,1010 675.95,1058 758.74,1058 772.95,1043.78 772.95,1017 765.95,1010 675.95,1010

## Polygon pours and split planes (outlines as drawn)
P5V_DP4 on BOTTOM "BOTTOM-P5V_DP4" (solid, remove dead copper, pour order 32): 2333.17,128.4 2372.17,128.4 2379.17,121.4 2379.17,50.4 2375.17,46.4 2260.17,46.4 2254.17,52.4 2254.17,202.4 2269.17,217.4 2314.17,217.4 2314.17,147.4
1_2V on BOTTOM "BOTTOM-1_2V" (solid, remove dead copper, pour order 29): 896.95,1059.97 896.95,1015 891.95,1010 842.95,1010 839.95,1013 839.95,1029 815.95,1053 784.95,1053 762.95,1075 677.95,1075 673.95,1079 673.95,1127 830.95,1127
P5V_DP1_E on BOTTOM "BOTTOM-P5V_DP1_E" (solid, remove dead copper, pour order 28): 286.95,186 336.95,236 336.95,311 402.95,311 402.95,121 286.95,121
P5V_DP2_E on BOTTOM "BOTTOM-P5V_DP2_E" (solid, remove dead copper, pour order 27): 852.95,175 932.95,255 933.09,382.5 943.09,392.5 965.46,392.5 982.95,375 982.95,132 832.95,132 832.95,175
P5V_DP1 on BOTTOM "BOTTOM-P5V_DP1" (solid, remove dead copper, pour order 26): 175.95,80.89 175.95,113.49 171.96,117.49 171.96,122.34 170.96,128.01 170.95,323 113.02,379.43 113.02,817.43 114.02,830.43 192.95,829.99 192.95,400 234.15,358.72 239.32,352.16 243.11,348.78 245.99,346.96 282.95,310 282.95,206 268.95,192 268.95,113 279.95,102 537.95,102 552.95,117 1577.95,117 1577.92,34.5 619.32,34.5 604.32,19.5 237.34,19.5
ADAPTERIN on BOTTOM "BOTTOM-ADAPTERIN 1" (solid, remove dead copper, pour order 25): 182.95,1255 182.95,1335 261.95,1415 427.95,1415 437.95,1405 437.95,1380 263,1205.17 260.18,1203.52 257.51,1201.62 255.02,1199.5 252.72,1197.17 250.64,1194.65 248.78,1191.96 247.27,1189.31 207.95,1150 207.95,960 187.95,940 187.95,905 182.95,900 117.95,900 117.95,1190
P5V_DP4_E on BOTTOM "BOTTOM-P5V_DP4_E" (solid, remove dead copper, pour order 24): 2334.17,152.4 2334.17,322.4 2319.17,337.4 2319.17,382.4 2329.17,392.4 2349.17,392.4 2464.17,277.4 2464.17,147.4 2339.17,147.4
3_3V on BOTTOM "BOTTOM-3_3V" (solid, remove dead copper, pour order 23): 1110.95,1026 1126.95,1042 1196.95,1042 1214.95,1024 1214.95,1008 1208.95,1002 1120.95,1002 1110.95,1012
P5V_DP3_E on BOTTOM "BOTTOM-P5V_DP3_E" (solid, remove dead copper, pour order 21): 1657.95,395 1672.95,380 1672.95,140 1667.95,135 1524.09,134.5 1524.09,160.5 1532.95,170 1622.95,260 1622.95,380 1637.95,395
ADAPTERIN on BOTTOM "BOTTOM-ADAPTERIN" (solid, remove dead copper, pour order 20): 528.95,1360.76 528.95,1400.15 529.17,1400.95 530.01,1401.79 530.95,1402 551.95,1402 552.8,1401.81 553.31,1401.48 553.75,1400.92 553.95,1400 553.94,1360.46 553.33,1359.27 552.47,1358.83 551.95,1358.76 530.6,1358.79 530,1358.98 529.16,1359.82
5VBUS on BOTTOM "BOTTOM-5VBUS" (solid, remove dead copper, pour order 19): 1392.95,1260 1392.95,1335 1402.95,1345 1462.95,1345 1462.95,1270 1448.45,1255.5 1397.45,1255.5
DGND on BOTTOM "BOTTOM-No Net" (solid, remove dead copper, pour order 18): -100,1205 -100,1395 cw(c0,1395) 0,1495 630,1495 2875,1495 cw(c2875,1395) 2975,1395 2975,155 2975,0 cw(c2875,0) 2875,-100 2695,-100 0,-100 cw(c0,0) -100,0 -100,180
DGND on TOP "BOTTOM-No Net" (solid, remove dead copper, pour order 17): -100,1205 -100,1395 cw(c0,1395) 0,1495 630,1495 2875,1495 cw(c2875,1395) 2975,1395 2975,155 2975,0 cw(c2875,0) 2875,-100 2695,-100 0,-100 cw(c0,0) -100,0 -100,180
N19324774 on TOP "TOP-N19324774" (solid, remove dead copper, pour order 31): 1241.95,1264 1241.95,1369 1308.95,1369 1332.95,1345 1332.95,1250 1255.95,1250
ADAPTERIN on TOP "TOP-ADAPTERIN" (solid, remove dead copper, pour order 30): 1532.95,1395 1542.95,1385 1542.95,1300 1532.95,1290 1467.95,1290 1437.95,1320 1437.95,1385 1447.95,1395
5VBUS on TOP "TOP-5VBUS" (solid, remove dead copper, pour order 22): 1432.95,1300 1432.95,1265 1392.95,1225 1392.95,1195 1352.95,1195 1352.95,1311 1421.95,1311

## Keep-outs
Keep-Out Layer:
  lines w6: -100,108.7 -100,1394.49 ; -100,158.7 -100,-1.17 ccw(c-1.17,-1.17) -1.17,-100 96.06,-100 2876.06,-100 ; -100,1395.66 cw(c-1.17,1395.66) -1.17,1494.49 2877.23,1494.49 cw(c2877.23,1395.66) 2976.06,1395.66 2976.06,-1.17 cw(c2877.23,-1.17) 2877.23,-100

## Other copper
TOP:
  region net N17202796: 754.95,1045 754.95,1022 760.95,1016 819.95,1016 819.95,1030 798.95,1051 758.95,1051 755,1045
  region net ADAPTERIN: 552.95,1104 807.95,1104 841.95,1070 841.95,1038 829.95,1038 805.95,1062 693.95,1062 655.95,1024 632.95,1024 552.95,1104
  region net ADAPTERIN: 1141.95,1018 1141.95,1029 1195.95,1083 1229.95,1083 1229.95,1036 1195.95,1036 1177.95,1018 1141.95,1018

## Silkscreen, mask and mechanical layers (free items; w line width, h text height)
Top Overlay:
  lines w5: 100,1085 130,1085 ; 115,1070 115,1100
Bottom Overlay:
  lines w3.94: 2135,1270 ccw(c2185,1270) 2185,1220 2655,1220 ccw(c2655,1270) 2705,1270 2705,1350 ccw(c2655,1350) 2655,1400 2640,1400 2185,1400 ccw(c2185,1350) 2135,1350 2135,1270
  lines w11.81: 2150,1269.14 ccw(c2184.14,1269.14) 2184.14,1235 2655.86,1235 ccw(c2655.86,1269.14) 2690,1269.14 2690,1350.86 ccw(c2655.86,1350.86) 2655.86,1385 2550,1385 2184.14,1385 ccw(c2184.14,1350.86) 2150,1350.86 2150,1269.14
  text "USBHB00.PCB" at 2665,1315 h78.74
  text "MD:140330" at 2604.09,1255 h78.74
Top Solder:
  rectangle: 1878.74,1178.7 2718.74,1193.7
  text "Micro USB" at 1426.89,1430 h59.06
  text "DC" at 31.89,1260 h78.74 r270
  text "USB3.0 HUB" at 1876.89,1210 h157.48
  text "VL812-Q7  fo USB3.0  By:Zsj" at 1938.74,1123.7 h62.99
Layer_20:
  text "VL0093B" at 1267.95,780 h30
  text "VL812-QFN76" at 1277.95,700 h25
  text "+" at 192.95,525 h30
OUTLINE:
  lines w1: 67.95,-100 2115.2,-100 2115.2,1494.49 67.95,1494.49 67.95,-100
  lines w6: 67.95,-100 67.95,1494.49 2115.2,1494.49 2115.2,-100 67.95,-100
DIMENSION:
  lines w1: 67.95,-371.65 1024.65,-371.65 ; 67.95,-371.65 1024.65,-371.65 ; 67.95,-371.65 225.43,-396.26 ; 67.95,-371.65 225.43,-396.26 ; 67.95,-371.65 225.43,-347.05 ; 67.95,-371.65 225.43,-347.05 ; 225.43,-396.26 225.43,-347.05 ; 225.43,-396.26 225.43,-347.05 ; 398.66,-229.92 796.3,-229.92 ; 398.66,-229.92 796.3,-229.92 ; 398.66,-229.92 556.14,-205.32 ; 398.66,-229.92 556.14,-254.53 ; 398.66,-229.92 556.14,-254.53 ; 398.66,-229.92 556.14,-205.32 ; 556.14,-254.53 556.14,-205.32 ; 556.14,-254.53 556.14,-205.32 ; 796.3,-229.92 1091.57,-229.92 ; 796.3,-229.92 1091.57,-229.92 ; 934.09,-254.53 1091.57,-229.92 ; 934.09,-254.53 1091.57,-229.92 ; 934.09,-254.53 934.09,-205.32 ; 934.09,-254.53 934.09,-205.32 ; 934.09,-205.32 1091.57,-229.92 ; 934.09,-205.32 1091.57,-229.92 ; 1024.65,-371.65 2115.2,-371.65 ; 1024.65,-371.65 2115.2,-371.65 ; 1091.57,-328.35 1091.57,333.07 ; 1091.57,-328.35 1091.57,333.07 ; 1091.57,-328.35 1091.57,333.07 ; 1091.57,-328.35 1091.57,333.07 ; 1091.57,-229.92 1249.05,-205.32 ; 1091.57,-229.92 1249.05,-205.32 ; 1091.57,-229.92 1445.91,-229.92 ; 1091.57,-229.92 1445.91,-229.92 ; 1091.57,-229.92 1249.05,-254.53 ; 1091.57,-229.92 1249.05,-254.53 ; 1249.05,-254.53 1249.05,-205.32 ; 1249.05,-254.53 1249.05,-205.32 ; 1445.91,-229.92 1784.49,-229.92 ; 1445.91,-229.92 1784.49,-229.92 ; 1627.01,-254.53 1627.01,-205.32 ; 1627.01,-254.53 1627.01,-205.32 ; 1627.01,-254.53 1784.49,-229.92 ; 1627.01,-254.53 1784.49,-229.92 ; 1627.01,-205.32 1784.49,-229.92 ; 1627.01,-205.32 1784.49,-229.92 ; 1957.72,-396.26 2115.2,-371.65 ; 1957.72,-396.26 2115.2,-371.65 ; 1957.72,-396.26 1957.72,-347.05 ; 1957.72,-396.26 1957.72,-347.05 ; 1957.72,-347.05 2115.2,-371.65 ; 1957.72,-347.05 2115.2,-371.65 ; 2303.19,57.48 2327.8,-100 ; 2303.19,57.48 2327.8,-100 ; 2303.19,57.48 2352.4,57.48 ; 2303.19,57.48 2352.4,57.48 ; 2303.19,1337.01 2327.8,1494.49 ; 2303.19,1337.01 2327.8,1494.49 ; 2303.19,1337.01 2352.4,1337.01 ; 2303.19,1337.01 2352.4,1337.01 ; 2327.8,-100 2352.4,57.48 ; 2327.8,-100 2352.4,57.48 ; 2327.8,-100 2327.8,616.53 ; 2327.8,-100 2327.8,616.53 ; 2327.8,616.53 2327.8,1494.49 ; 2327.8,616.53 2327.8,1494.49 ; 2327.8,1494.49 2352.4,1337.01 ; 2327.8,1494.49 2352.4,1337.01 ; 67.95,-470.08 67.95,-198.42 67.95,-470.08 ; 398.66,-328.35 398.66,333.07 398.66,-328.35 ; 1784.49,-328.35 1784.49,333.07 1784.49,-328.35 ; 2115.2,-470.08 2115.2,-198.42 2115.2,-470.08 ; 2213.62,-100 2426.22,-100 2213.62,-100 ; 2213.62,1494.49 2426.22,1494.49 2213.62,1494.49
  text "40.5" at 2265.3,384.03 h37.5 r90
  text "40.5" at 2265.3,384.03 h37.5 r90
  text "17.6" at 1252.99,-214.17 h37.5
  text "17.6" at 1252.99,-214.17 h37.5
  text "17.6" at 615.19,-218.11 h37.5
  text "17.6" at 615.19,-218.11 h37.5
  text "52" at 957.71,-359.84 h37.5
  text "52" at 957.71,-359.84 h37.5